# Altium PCB MTB.TEMPLATE.PcbDoc (part 1 of 3)
Units mm, origin at the board's own origin, x right, y up, seen from the top; angles counter-clockwise.
Board outline 100 x 100 mm, 2 copper layers (Top Layer, Bottom Layer), stack 1.576 mm thick; 279 components, 187 nets, 803 pads, 2 vias.
Unrouted connection lines stored in the file: 418.
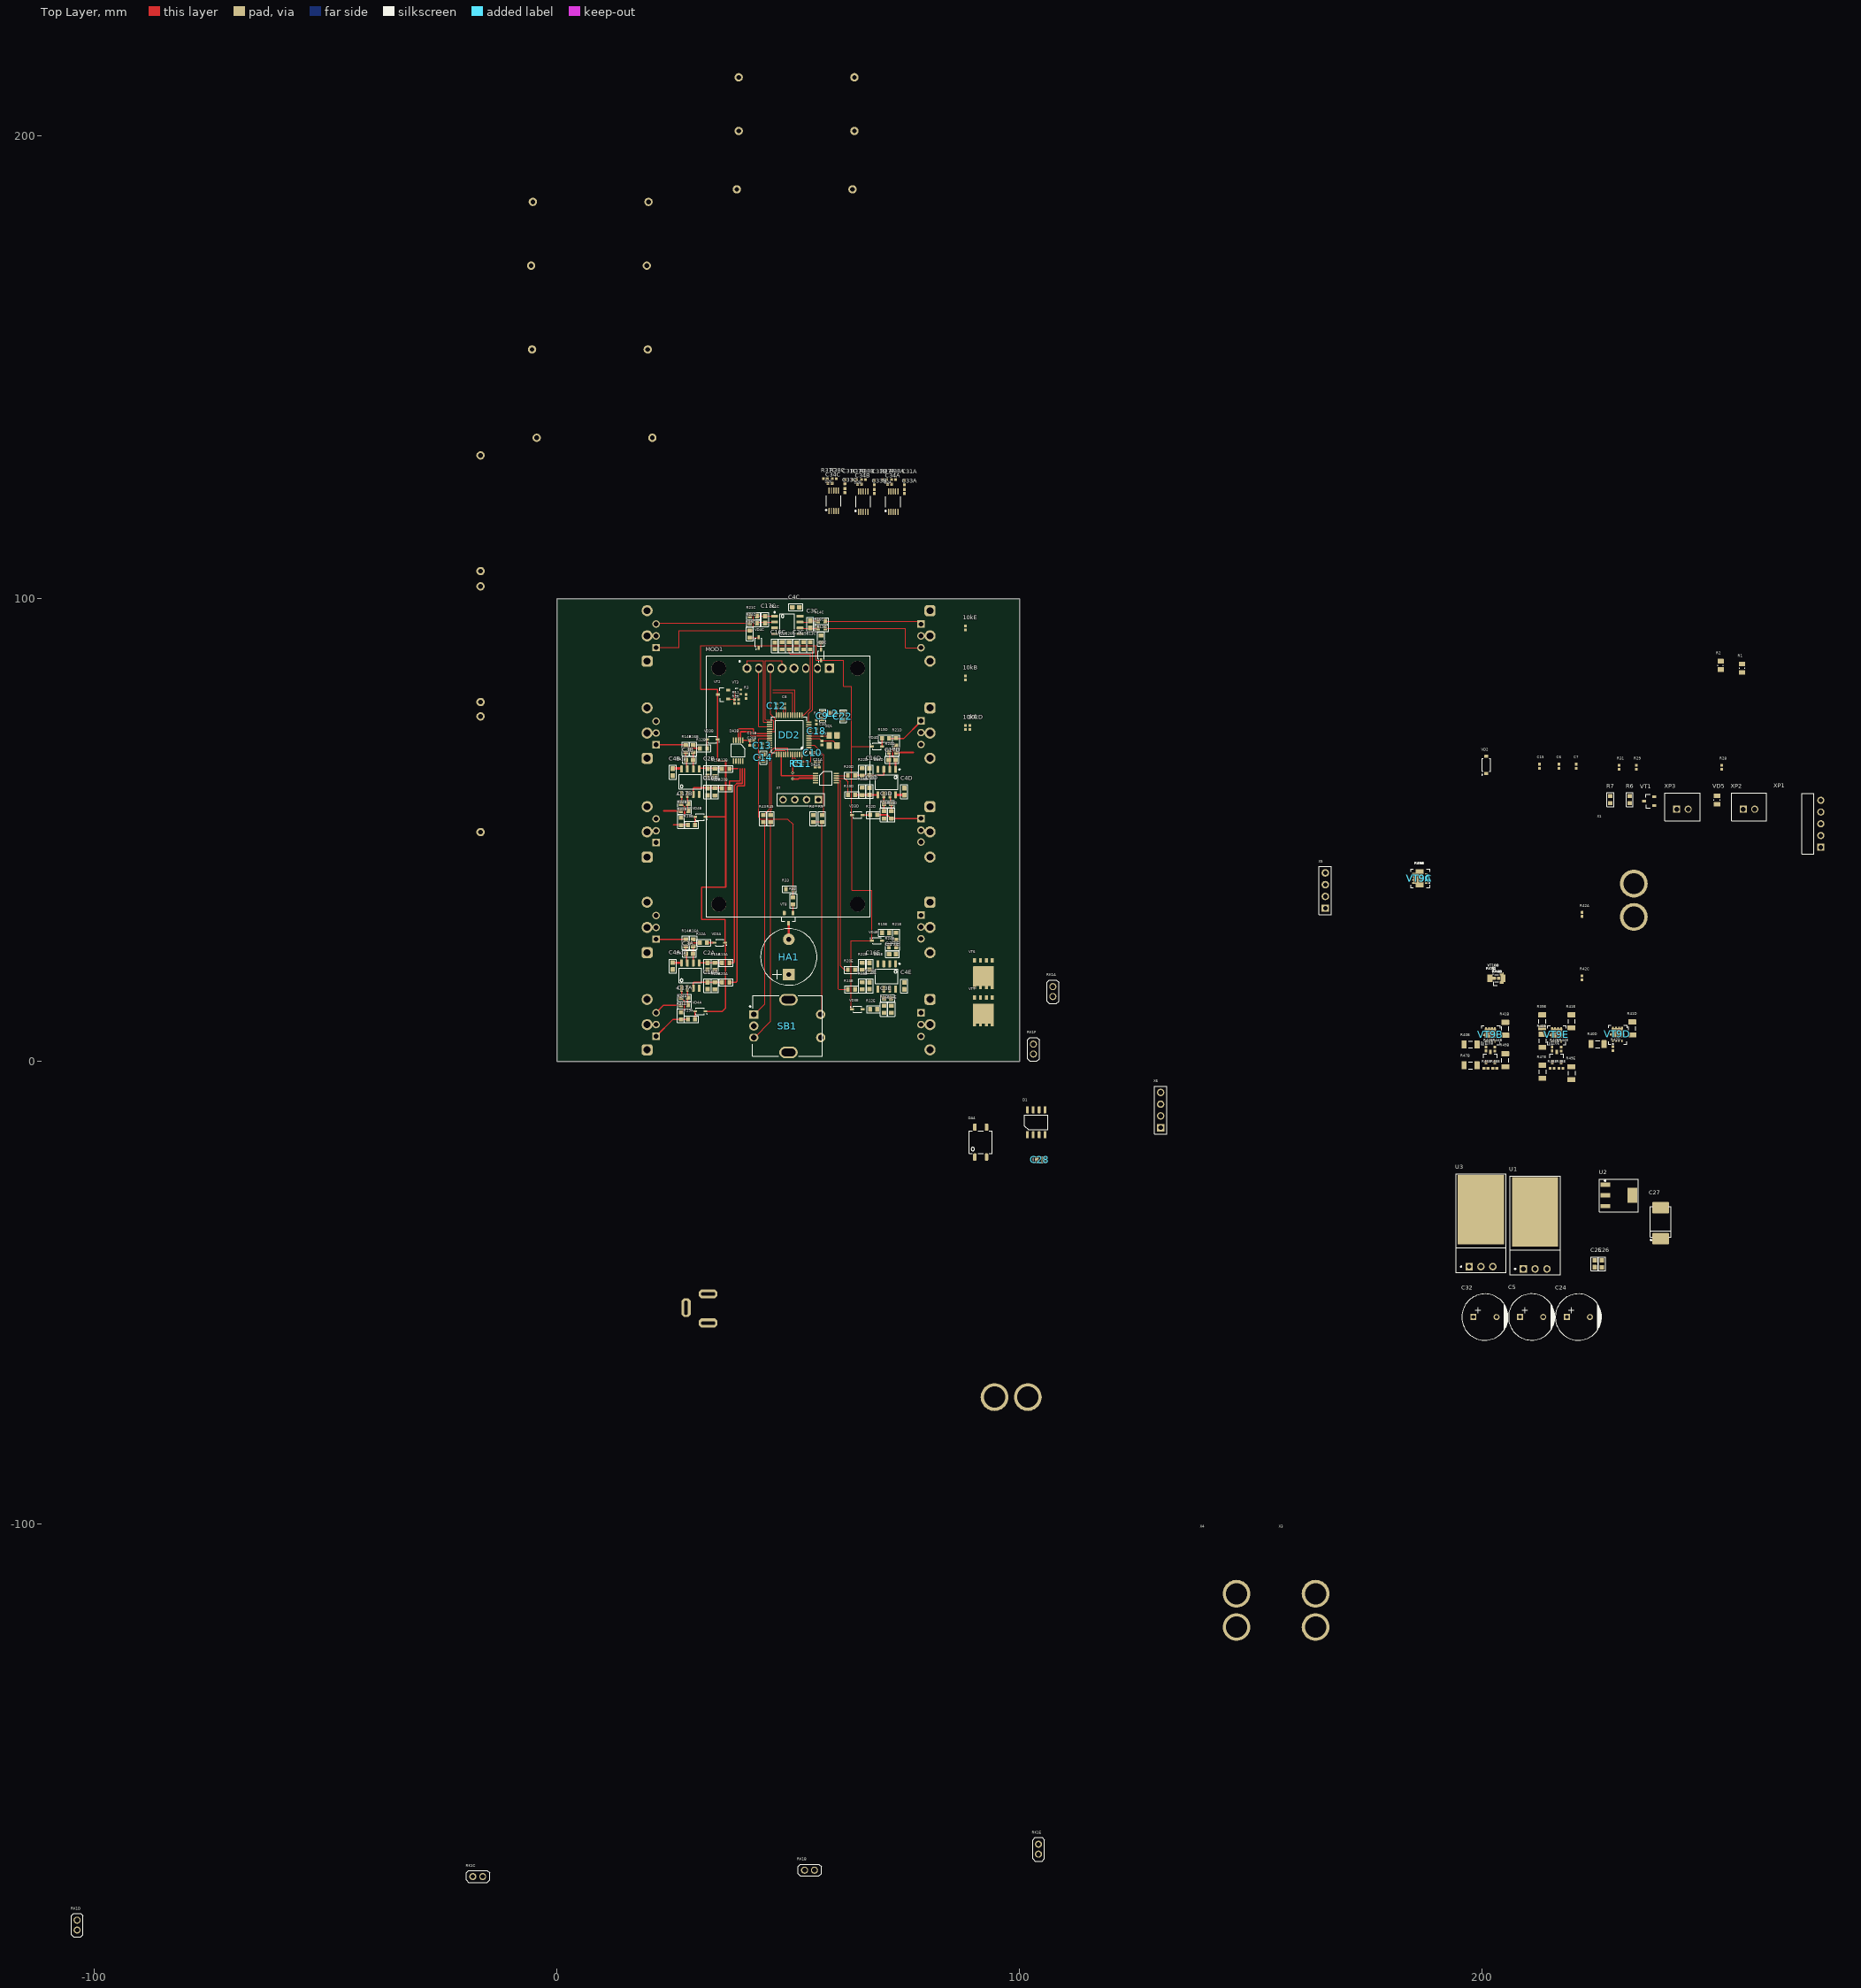
[diagram p0: Top Layer view]
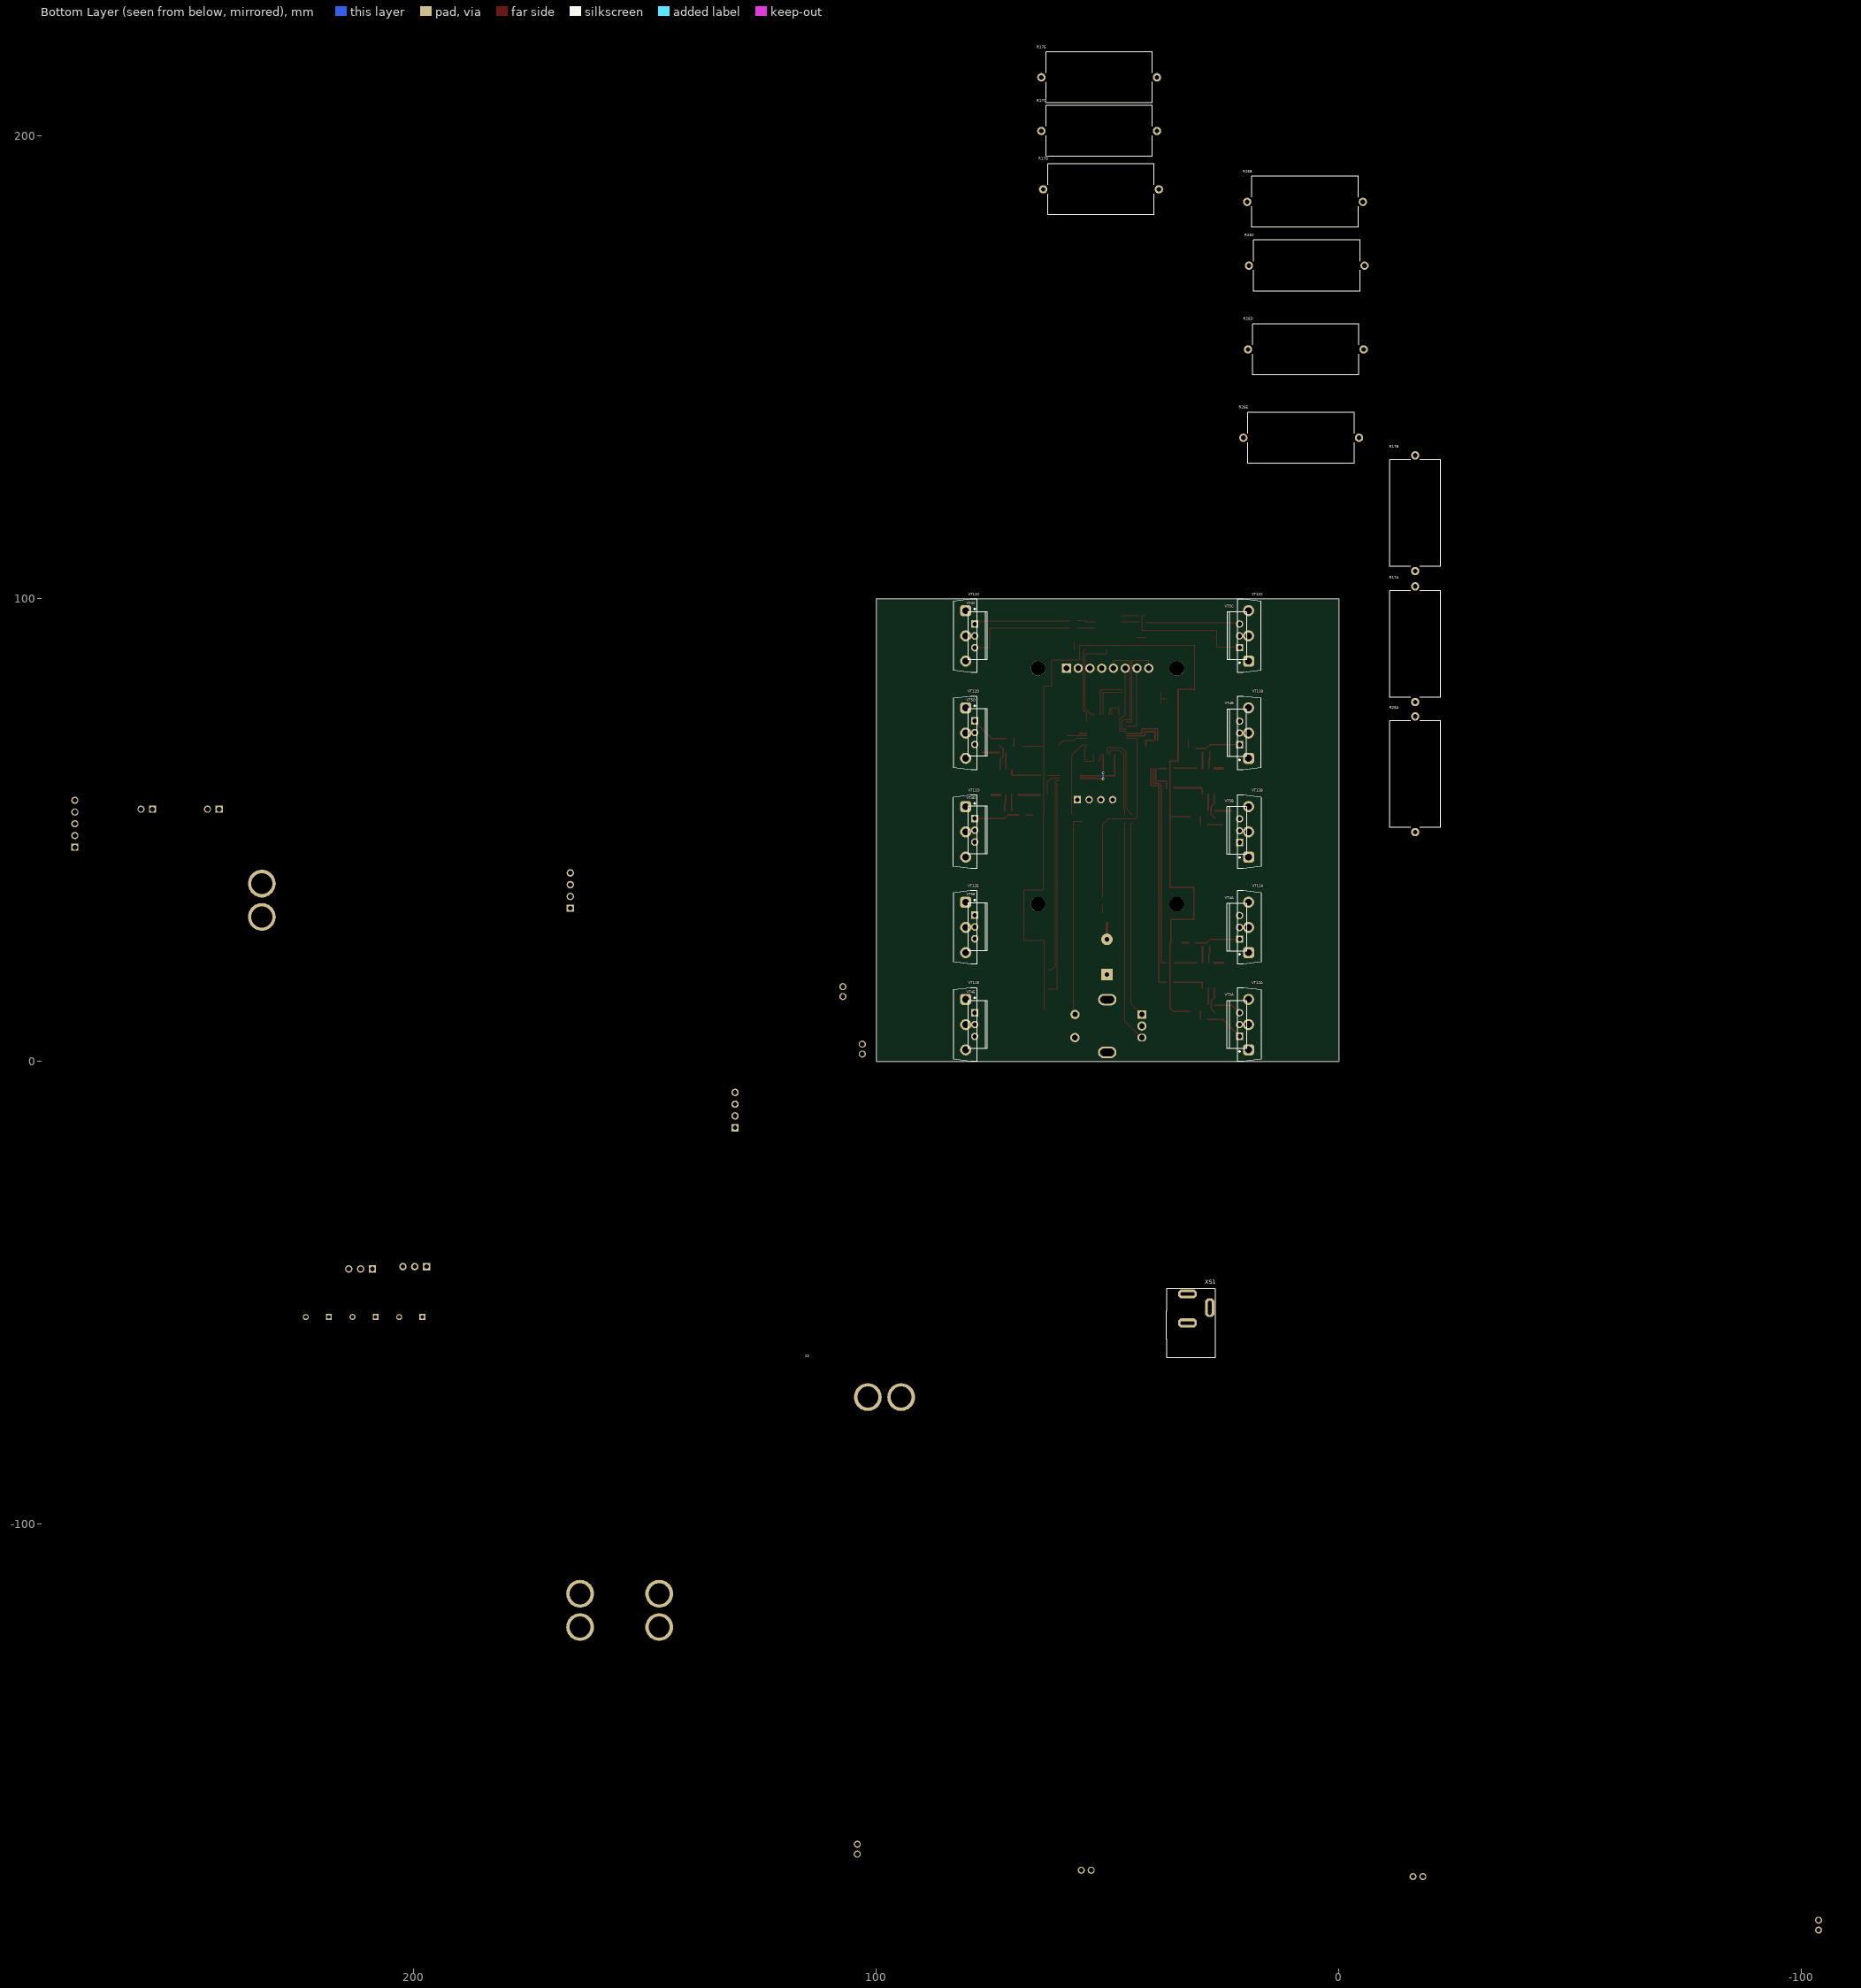
[diagram p1: Bottom Layer view, seen from below]

## Layer stack, top to bottom
Top Solder: solder mask 0.012, Solder Resist, Dk 3.5
Top Layer: signal copper 0.038
Dielectric 1: dielectric 1.5, FR-4, Dk 4.8
Bottom Layer: signal copper 0.038
Bottom Solder: solder mask 0.012, Solder Resist, Dk 3.5

## Board outline
0,0 100,0 100,100 0,100

## Design rules (kind name [scope] priority, off if disabled: settings)
BoardOutlineClearance PCIE_CONN_Clearence [InNet('RS485B(M)','24V0','RS485B(R)_OUT','RS485B(R)_IN','RS485A(FB)')] p1: gap=0.25 ignorepadtopadclearanceinfootprint=FALSE
BoardOutlineClearance [All xor InComponent('A1')] p2: gap=0.5 ignorepadtopadclearanceinfootprint=FALSE
Clearance MiddleVoltage [InNetClass('MiddleVoltage')] p1: gap=0.5 ignorepadtopadclearanceinfootprint=FALSE except(0: Arc-Hole Track-Hole SMDPad-Hole THPad-Hole Via-Hole Fill-Hole Poly-Hole Region-Hole Text-Hole; 0.2: Arc-Text Track-Text SMDPad-Text THPad-Text Via-Text Fill-Text Poly-Text Region-Text Text-Text)
Clearance HighVoltage [InNetClass('HighVoltage')] p2: gap=1 ignorepadtopadclearanceinfootprint=FALSE except(0: Arc-Hole Track-Hole SMDPad-Hole THPad-Hole Via-Hole Fill-Hole Poly-Hole Region-Hole Text-Hole; 0.2: Arc-Text Track-Text SMDPad-Text THPad-Text Via-Text Fill-Text Poly-Text Region-Text Text-Text)
Clearance Standart [All] p3: gap=0.2 ignorepadtopadclearanceinfootprint=FALSE except(0: Arc-Hole Track-Hole SMDPad-Hole THPad-Hole Via-Hole Fill-Hole Poly-Hole Region-Hole Text-Hole)
ComponentClearance [All] p1: gap=0.1 collisioncheckmode=3 verticalgap=0.1 showdistances=TRUE
DiffPairsRouting ETH_100_OHM [InDifferentialPairClass('ETH')] p1: maxlimit=0.2 minlimit=0.2 mostfreqgap=0.2 toplayer_minwidth=0.2 toplayer_maxwidth=0.3 toplayer_prefwidth=0.3 bottomlayer_minwidth=0.2 bottomlayer_maxwidth=0.3 bottomlayer_prefwidth=0.3 maxuncoupledlength=12.7
DiffPairsRouting USB_90_OHM [InDifferentialPairClass('USB')] p2: maxlimit=0.2 minlimit=0.2 mostfreqgap=0.2 toplayer_minwidth=0.2 toplayer_maxwidth=0.45 toplayer_prefwidth=0.45 bottomlayer_minwidth=0.2 bottomlayer_maxwidth=0.45 bottomlayer_prefwidth=0.45 maxuncoupledlength=12.7
DiffPairsRouting [All] p3: maxlimit=0.2 minlimit=0.2 mostfreqgap=0.2 toplayer_minwidth=0.2 toplayer_maxwidth=0.5 toplayer_prefwidth=0.3 bottomlayer_minwidth=0.2 bottomlayer_maxwidth=0.5 bottomlayer_prefwidth=0.3 maxuncoupledlength=12.7
Height [All] p1: minheight=0 maxheight=40 prefheight=12.7
HoleSize [All] p1: absolutevalues=TRUE maxlimit=12 minlimit=0.3 maxpercent=80.000 minpercent=20.000
HoleToHoleClearance [All] p1: gap=0.3 allowstackedmicrovias=TRUE
MinimumSolderMaskSliver [All] p1: minsoldermaskwidth=0.1
NetAntennae [All] p1: netantennaetolerance=2
PlaneClearance [All] p1: clearance=0.3
PlaneConnect PlaneConnectMiddleCurrent [InNetClass('MiddleCurrent')] p1: planeconnectstyle=Relief reliefexpansion=0.508 reliefentries=4 reliefconductorwidth=0.5 reliefairgap=0.3
PlaneConnect PlaneHighCurrent [InNetClass('HighCurrent')] p2: planeconnectstyle=Relief reliefexpansion=0.508 reliefentries=4 reliefconductorwidth=0.5 reliefairgap=0.35
PlaneConnect [All] p3: planeconnectstyle=Relief reliefexpansion=0.508 reliefentries=4 reliefconductorwidth=0.3 reliefairgap=0.3
PolygonConnect PolygonConnect_TPPTH [All vs HasFootprint('TP_PTH_1mm')] p1: connectstyle=Direct reliefconductorwidth=0.3 reliefentries=4 polygonreliefangle="90 Angle" airgapwidth=0.25
PolygonConnect PolygonConnect_TPSMD2mm [All vs HasFootprint('TP_SMD_2mm')] p2: connectstyle=Direct reliefconductorwidth=0.3 reliefentries=4 polygonreliefangle="90 Angle" airgapwidth=0.25
PolygonConnect PolygonConnect_Via [IsVia] p3: connectstyle=Direct reliefconductorwidth=0.254 reliefentries=4 polygonreliefangle="90 Angle" airgapwidth=0.254
PolygonConnect PolygonConnectMiddleCurrent [All vs InNetClass('MiddleCurrent')] p4: connectstyle=Relief reliefconductorwidth=0.4 reliefentries=4 polygonreliefangle="90 Angle" airgapwidth=0.3
PolygonConnect PolygonHighCurrent [InNetClass('HighCurrent')] p5: connectstyle=Relief reliefconductorwidth=0.5 reliefentries=4 polygonreliefangle="90 Angle" airgapwidth=0.3
PolygonConnect PolygonConnect_Keepout [(ObjectKind = 'Track') And (Layer = 'KeepOutLayer')] p6: connectstyle=Direct reliefconductorwidth=0.254 reliefentries=4 polygonreliefangle="90 Angle" airgapwidth=0.254
PolygonConnect [All] p7: thpad.connectstyle=Relief thpad.reliefconductorwidth=0.3 thpad.reliefentries=4 thpad.polygonreliefangle="90 Angle" thpad.airgapwidth=0.25 smdpad.connectstyle=Relief smdpad.reliefconductorwidth=0.3 smdpad.reliefentries=4 smdpad.polygonreliefangle="90 Angle" smdpad.airgapwidth=0.25 via.connectstyle=Direct via.reliefconductorwidth=0.3 via.reliefentries=4 via.polygonreliefangle="90 Angle" via.airgapwidth=0.3
RoomDefinition U_DACB [InComponentClass('U_DACB')] p1: confinementstyle=ConfineIn formatcopy=TRUE lockcomponents=FALSE outline -797.7,-753.186 -746.9,-753.186 -746.9,-727.786 -797.7,-727.786
RoomDefinition U_INA228C [InComponentClass('U_INA228C')] p2: confinementstyle=ConfineIn formatcopy=TRUE lockcomponents=FALSE outline -797.7,-753.186 -746.9,-753.186 -746.9,-727.786 -797.7,-727.786
RoomDefinition U_INA228B [InComponentClass('U_INA228B')] p3: confinementstyle=ConfineIn formatcopy=TRUE lockcomponents=FALSE outline -797.7,-753.186 -746.9,-753.186 -746.9,-727.786 -797.7,-727.786
RoomDefinition U_INA228A [InComponentClass('U_INA228A')] p4: confinementstyle=ConfineIn formatcopy=TRUE lockcomponents=FALSE outline -797.7,-753.186 -746.9,-753.186 -746.9,-727.786 -797.7,-727.786
RoomDefinition U_DACA [InComponentClass('U_DACA')] p5: confinementstyle=ConfineIn formatcopy=TRUE lockcomponents=FALSE outline -797.7,-753.186 -746.9,-753.186 -746.9,-727.786 -797.7,-727.786
RoomDefinition LOADD [InComponentClass('LOADD')] p6: confinementstyle=ConfineIn formatcopy=TRUE lockcomponents=FALSE outline -797.7,-753.186 -746.9,-753.186 -746.9,-727.786 -797.7,-727.786
RoomDefinition LOADE [InComponentClass('LOADE')] p7: confinementstyle=ConfineIn formatcopy=TRUE lockcomponents=FALSE outline -797.7,-753.186 -746.9,-753.186 -746.9,-727.786 -797.7,-727.786
RoomDefinition LOADC [InComponentClass('LOADC')] p8: confinementstyle=ConfineIn formatcopy=TRUE lockcomponents=FALSE outline -797.7,-753.186 -746.9,-753.186 -746.9,-727.786 -797.7,-727.786
RoomDefinition LOADB [InComponentClass('LOADB')] p9: confinementstyle=ConfineIn formatcopy=TRUE lockcomponents=FALSE outline -797.7,-753.186 -746.9,-753.186 -746.9,-727.786 -797.7,-727.786
RoomDefinition LOADA [InComponentClass('LOADA')] p10: confinementstyle=ConfineIn formatcopy=TRUE lockcomponents=FALSE outline -797.7,-753.186 -746.9,-753.186 -746.9,-727.786 -797.7,-727.786
RoutingCorners [All] p1: cornerstyle=45-Degree minsetback=1 maxsetback=3
RoutingVias Power [InNetClass('Power')] p1: holewidth=0.8 width=1.5 viastyle="Through Hole" minholewidth=0.5 minwidth=1 maxholewidth=1.2 maxwidth=3
RoutingVias [All] p2: holewidth=0.3 width=0.6 viastyle="Through Hole" minholewidth=0.3 minwidth=0.6 maxholewidth=0.5 maxwidth=1
SilkToSilkClearance [All] p1: silktosilkclearance=0.15
SilkToSolderMaskClearance [IsPad or IsRegion] p1: minsilkscreentomaskgap=0.15 clearancetoexposedcopper=FALSE
SolderMaskExpansion SolderMaskExpansion_VIA [IsVia] p1: expansion=-3 istentingtop=TRUE useseparateexpansions=TRUE expansionbottom=-3 istentingbottom=TRUE
SolderMaskExpansion [All] p2: expansion=0.05 istentingtop=FALSE
SupplyNets "Schematic Supply Nets_8" [InNet('VBUS')] p1: voltage=0.000
SupplyNets "Schematic Supply Nets_7" [InNet('V_MCU')] p2: voltage=0.000
SupplyNets "Schematic Supply Nets_6" [InNet('5V0')] p3: voltage=0.000
SupplyNets "Schematic Supply Nets_5" [InNet('EXTI')] p4: voltage=0.000
SupplyNets "Schematic Supply Nets_4" [InNet('POWER')] p5: voltage=0.000
SupplyNets "Schematic Supply Nets_2" [InNet('12V0')] p6: voltage=0.000
SupplyNets "Schematic Supply Nets_1" [InNet('3V3')] p7: voltage=0.000
SupplyNets "Schematic Supply Nets" [InNet('GND')] p8: voltage=0.000
Width Width_50_OHM [InNetClass('Anthenna')] p1: maxlimit=0.88 minlimit=0.2 preferedwidth=0.88
Width WidthMiddleCurrent [InNetClass('MiddleCurrent')] p2: maxlimit=2 minlimit=0.35 preferedwidth=0.5
Width WidthHighCurrent [InNetClass('HighCurrent')] p3: maxlimit=5 minlimit=0.5 preferedwidth=1
Width [All] p4: maxlimit=1 minlimit=0.2 preferedwidth=0.3
18 further rules are at their usual default settings.

## Classes and differential pairs
component class THERMO_SENSORF: 10kF RK1F
component class THERMO_SENSORE: 10kE RK1E
channel class DAC: U_DACA U_DACB
component class U_DACA: C20A C21A DA3A
component class U_BIPOLAR: DA4 R28 R29 VT6 VT7
channel class INA228: U_INA228A U_INA228B U_INA228C
component class U_INA228A: C31A C33A C34A D2A R37A R38A
component class U_INA228B: C31B C33B C34B D2B R37B R38B
component class U_INA228C: C31C C33C C34C D2C R37C R38C
component class ELOAD: C1 C5 C22 C24 C25 C26 C27 C28 C32 D1 HA1 MOD1 R1 R2 R3 R4 R6 R7 R9 R10 R11 R32 R33 R43 R45 SB1 U1 U2 U3 VD2 VD5 VT1 VT2 VT3 VT8 X1 X2 X3 X4 X5 X6 XP2 XP3 XS1
component class U_DACB: C20B C21B DA3B
channel class THERMO_SENSOR: THERMO_SENSORA THERMO_SENSORB THERMO_SENSORC THERMO_SENSORD THERMO_SENSORE THERMO_SENSORF
channel class LOAD: LOADA LOADB LOADC LOADD LOADE
component class THERMO_SENSORD: 10kD RK1D
component class THERMO_SENSORC: 10kC RK1C
component class THERMO_SENSORB: 10kB RK1B
component class THERMO_SENSORA: RK1A
component class LOADE: C2E C3E C4E C16E C17E DA1E R12E R13E R14E R15E R16E R17E R19E R20E R21E R22E R24E R26E R39E R40E R41E R42E R44E R46E R47E R48E R49E VD3E VD4E VT4E VT5E VT9E VT10E VT11E VT12E
component class LOADD: C2D C3D C4D C16D C17D DA1D R12D R13D R14D R15D R16D R17D R19D R20D R21D R22D R24D R26D R39D R40D R41D R42D R44D R46D R47D R48D R49D VD3D VD4D VT4D VT5D VT9D VT10D VT11D VT12D
component class LOADC: C2C C3C C4C C16C C17C DA1C R12C R13C R14C R15C R16C R17C R19C R20C R21C R22C R24C R26C R39C R40C R41C R42C R44C R46C R47C R48C R49C VD3C VD4C VT4C VT5C VT9C VT10C VT11C VT12C
component class LOADB: C2B C3B C4B C16B C17B DA1B R12B R13B R14B R15B R16B R17B R19B R20B R21B R22B R24B R26B R39B R40B R41B R42B R44B R46B R47B R48B R49B VD3B VD4B VT4B VT5B VT9B VT10B VT11B VT12B
component class LOADA: C2A C3A C4A C16A C17A DA1A R12A R13A R14A R15A R16A R17A R19A R20A R21A R22A R24A R26A R39A R40A R41A R42A R44A R46A R47A R48A R49A VD3A VD4A VT4A VT5A VT9A VT10A VT11A VT12A
component class U_MTB.ESP32-S3: C6 C7 C8 C9 C10 C11 C12 C13 C14 C15 C18 C29 C30 DD2 L2 R5 R30 R31 X7 XP1 ZQ1

## Components (designator, comment, footprint, x,y, rotation, side; value= is the part's Value field where it differs from the comment)
10kB "10 k" R0402 88.298,82.913 r90 top (schematic designator 10k)
10kC "10 k" R0402 88.298,72.213 r90 top (schematic designator 10k)
10kD "10 k" R0402 89.3,72.225 r90 top (schematic designator 10k)
10kE "10 k" R0402 88.298,93.713 r90 top (schematic designator 10k)
C1 "0.1µF" C_CERAMIC_0402_MED 203.098,18.013 r0 top
C2A "0.1uF" C0603(1608)#1 32.552,20.604 r270 top (schematic designator C2)
C2B "0.1uF" C0603(1608)#1 32.552,62.504 r270 top (schematic designator C2)
C2C "0.1uF" C0603(1608)#2 51.8,89.85 r270 top (schematic designator C2)
C2D "0.1uF" C0603(1608)#1 67.598,58.396 r90 top (schematic designator C2)
C2E "0.1uF" C0603(1608)#1 67.598,16.396 r90 top (schematic designator C2)
C3A "0.1uF" C0603(1608)#1 28.658,23.301 r0 top (schematic designator C3)
C3B "0.1uF" C0603(1608)#1 28.658,65.201 r0 top (schematic designator C3)
C3C "0.1uF" C0603(1608)#1 54.754,94.483 r270 top (schematic designator C3)
C3D "0.1uF" C0603(1608)#1 71.492,55.699 r180 top (schematic designator C3)
C3E "0.1uF" C0603(1608)#1 71.492,13.699 r180 top (schematic designator C3)
C4A "0.1uF" C0603(1608)#1 25.05,20.65 r270 top (schematic designator C4)
C4B "0.1uF" C0603(1608)#1 25.05,62.55 r270 top (schematic designator C4)
C4C "0.1uF" C0603(1608)#1 51.65,98.2 r180 top (schematic designator C4)
C4D "0.1uF" C0603(1608)#1 75.1,58.35 r90 top (schematic designator C4)
C4E "0.1uF" C0603(1608)#1 75.1,16.35 r90 top (schematic designator C4)
C5 "1000uF" "CAP 10x16" 210.698,-55.187 r0 top
C6 "10µF" C_CERAMIC_0402_MED 216.598,63.813 r90 top
C7 "0.1uF" C_CERAMIC_0402_MED 220.298,63.813 r90 top
C8 "0.1uF" C_CERAMIC_0402_MED 49.2,76.87 r270 top
C9 "10µF" C0603(1608)#3 57.4,74.725 r270 top
C10 "0.1uF" C_CERAMIC_0402_MED 55.3,66.8 r180 top
C11 "0.1uF" C_CERAMIC_0402_MED 53,64.36 r90 top
C12 "0.1uF" C_CERAMIC_0402_MED 47.457,76.87 r270 top
C13 "0.1uF" C_CERAMIC_0402_MED 44.385,68.29 r270 top
C14 "1µF" C0603(1608)#3 44.6,65.7 r270 top
C15 "0.1uF" C_CERAMIC_0402_MED 212.398,63.813 r90 top
C16A "0.1uF" C0603(1608)#1 32.55,16.4 r270 top (schematic designator C16)
C16B "0.1uF" C0603(1608)#1 32.55,58.3 r270 top (schematic designator C16)
C16C "0.1uF" C0603(1608)#2 47.1,89.85 r270 top (schematic designator C16)
C16D "0.1uF" C0603(1608)#1 67.6,62.6 r90 top (schematic designator C16)
C16E "0.1uF" C0603(1608)#1 67.6,20.6 r90 top (schematic designator C16)
C17A "0.1uF" C0603(1608)#1 27.6,13.799 r0 top (schematic designator C17)
C17B "0.1uF" C0603(1608)#1 27.6,55.699 r0 top (schematic designator C17)
C17C "0.1uF" C0603(1608)#1 44.982,95.521 r270 top (schematic designator C17)
C17D "0.1uF" C0603(1608)#1 72.455,65.201 r180 top (schematic designator C17)
C17E "0.1uF" C0603(1608)#1 72.55,23.201 r180 top (schematic designator C17)
C18 "0.1uF" C_CERAMIC_0402_MED 56.095,71.439 r270 top
C20A "1uF" C_CERAMIC_0402_MED 56.296,64.81 r0 top (schematic designator C20)
C20B "1uF" C_CERAMIC_0402_MED 42.131,68.339 r0 top (schematic designator C20)
C21A "0.1uF" C_CERAMIC_0402_MED 56.296,63.71 r0 top (schematic designator C21)
C21B "0.1uF" C_CERAMIC_0402_MED 42.139,69.425 r0 top (schematic designator C21)
C22 "100nF 50V" C0603(1608)#3 61.8,74.625 r90 top
C24 "1000uF" "CAP 10x16" 220.8,-55.2 r0 top
C25 "0.1uF" C0603(1608)#1 224.298,-43.687 r90 top
C26 "0.1uF" C0603(1608)#1 225.9,-43.7 r90 top
C27 "220uF" CASE_D(7343) 238.6,-34.9 r90 top
C28 "100nF 50V" C0603(1608)#3 104.4,-21.2 r180 top
C29 "12pF" C_CERAMIC_0402_MED 57.273,68.865 r270 top
C30 "12pF" C_CERAMIC_0402_MED 57.273,70.865 r90 top
C31A "10uF" C0402(1005) 75.1,125.14 r270 top (schematic designator C31)
C31B "10uF" C0402(1005) 68.603,125.143 r270 top (schematic designator C31)
C31C "10uF" C0402(1005) 62.242,125.325 r270 top (schematic designator C31)
C32 "1000uF" "CAP 10x16" 200.6,-55.2 r0 top
C33A "0.1uF" C0402(1005) 75.1,123.2 r90 top (schematic designator C33)
C33B "0.1uF" C0402(1005) 68.603,123.203 r90 top (schematic designator C33)
C33C "0.1uF" C0402(1005) 62.242,123.385 r90 top (schematic designator C33)
C34A "10nF" C0402(1005) 71.9,124.8 r180 top (schematic designator C34)
C34B "10nF" C0402(1005) 65.403,124.803 r180 top (schematic designator C34)
C34C "10nF" C0402(1005) 59.042,124.985 r180 top (schematic designator C34)
D1 "TCAN332GD" SOIC-8_W3.9MM 103.6,-13.1 r0 top
D2A "INA228AIDGSR" TI-VSSOP-10-50P490X110 72.7,121 r90 top (schematic designator D2)
D2B "INA228AIDGSR" TI-VSSOP-10-50P490X110 66.203,121.003 r90 top (schematic designator D2)
D2C "INA228AIDGSR" TI-VSSOP-10-50P490X110 59.842,121.185 r90 top (schematic designator D2)
DA1A "LM358ADT" SOIC8 28.85,18.6 r90 top (schematic designator DA1)
DA1B "LM358ADT" SOIC8 28.85,60.5 r90 top (schematic designator DA1)
DA1C "LM358ADT" SOIC8 49.8,94.35 r0 top (schematic designator DA1)
DA1D "LM358ADT" SOIC8 71.3,60.4 r270 top (schematic designator DA1)
DA1E "LM358ADT" SOIC8 71.3,18.4 r270 top (schematic designator DA1)
DA3A "MCP4728A0T-E/UN" MSOP-10 58.138,61.26 r270 top (schematic designator DA3)
DA3B "MCP4728A0T-E/UN" MSOP-10 39.2,67.2 r180 top (schematic designator DA3)
DA4 "VOM1271T" SOP-4P254_492X720X222L65X51N 91.6,-17.4 r90 top
DD2 "STM32G431CBT6" LQFP48 50.217,70.61 r180 top
HA1 "TMB12A01" KPX-1205A 50.125,18.825 r90 top
L2 "BLM18AG102" BLM18(0603) 59.6,75.3 r180 top
MOD1 "TFT 1.8\" SPI Board" 1.8_TFT_BOARD 67.5,87.5 r180 top locked
R1 "30k" R_ANY_CHIP_0805_MED 256.2,85 r90 top
R2 "100k" R_ANY_CHIP_0805_MED 251.575,85.626 r90 top
R3 "10k" R_ANY_CHIP_0402_MED 40.911,78.918 r90 top
R4 "10 k" R0603 55.417,52.5 r90 top
R5 "1k" R_ANY_CHIP_0402_MED 51.7,64.36 r270 top
R6 "100" R0603 231.898,56.613 r90 top
R7 "100 k" R0603 227.698,56.613 r90 top
R9 "100" R0603 57.317,52.5 r90 top
R10 "220" R_ANY_CHIP_0402_MED 38.825,77.4 r180 top
R11 "220" R_ANY_CHIP_0402_MED 38.825,78.3 r180 top
R12A "1 k" R0603 31.7,25.7 r180 top (schematic designator R12)
R12B "1 k" R0603 31.71,67.69 r180 top (schematic designator R12)
R12C "1 k" R0603 57.1,91.325 r90 top (schematic designator R12)
R12D "1 k" R0603 68.45,53.3 r0 top (schematic designator R12)
R12E "1 k" R0603 68.45,11.3 r0 top (schematic designator R12)
R13A "1 k" R0603 36.499,21.371 r180 top (schematic designator R13)
R13B "1 k" R0603 36.499,63.271 r180 top (schematic designator R13)
R13C "1 k" R0603 54.777,89.85 r90 top (schematic designator R13)
R13D "1 k" R0603 63.72,57.629 r0 top (schematic designator R13)
R13E "1 k" R0603 63.651,15.629 r0 top (schematic designator R13)
R14A "1 k" R0603 27.85,25.675 r90 top (schematic designator R14)
R14B "1 k" R0603 27.85,67.575 r90 top (schematic designator R14)
R14C "1 k" R0603 57.228,95.195 r0 top (schematic designator R14)
R14D "1 k" R0603 72.3,53.325 r270 top (schematic designator R14)
R14E "1 k" R0603 72.3,11.325 r270 top (schematic designator R14)
R15A "1 k" R0603 34.152,20.604 r90 top (schematic designator R15)
R15B "1 k" R0603 34.152,62.504 r90 top (schematic designator R15)
R15C "1 k" R0603 53.3,89.85 r90 top (schematic designator R15)
R15D "1 k" R0603 65.998,58.396 r270 top (schematic designator R15)
R15E "1 k" R0603 65.998,16.396 r270 top (schematic designator R15)
R16A "1 k" R0603 29.45,25.675 r90 top (schematic designator R16)
R16B "1 k" R0603 29.45,67.575 r90 top (schematic designator R16)
R16C "1 k" R0603 57.228,93.66 r0 top (schematic designator R16)
R16D "1 k" R0603 70.7,53.325 r270 top (schematic designator R16)
R16E "1 k" R0603 70.7,11.325 r270 top (schematic designator R16)
R17A "0.22" R5W -16.5,90.2 r270 bottom (schematic designator R17)
R17B "0.22" R5W -16.5,118.5 r270 bottom (schematic designator R17)
R17C "0.22" R5W 51.8,201.1 r180 bottom (schematic designator R17)
R17D "0.22" R5W 51.4,188.5 r180 bottom (schematic designator R17)
R17E "0.22" R5W 51.8,212.7 r180 bottom (schematic designator R17)
R19A "1 k" R0603 29.096,9.153 r180 top (schematic designator R19)
R19B "1 k" R0603 29.106,51.143 r180 top (schematic designator R19)
R19C "1 k" R0603 41.7,92.4 r90 top (schematic designator R19)
R19D "1 k" R0603 71.054,69.847 r0 top (schematic designator R19)
R19E "1 k" R0603 71.054,27.847 r0 top (schematic designator R19)
R20A "1 k" R0603 36.499,17.153 r180 top (schematic designator R20)
R20B "1 k" R0603 36.499,59.053 r180 top (schematic designator R20)
R20C "1 k" R0603 50.2,89.85 r90 top (schematic designator R20)
R20D "1 k" R0603 63.651,61.847 r0 top (schematic designator R20)
R20E "1 k" R0603 63.651,19.847 r0 top (schematic designator R20)
R21A "1 k" R0603 26.825,9.9 r270 top (schematic designator R21)
R21B "1 k" R0603 26.835,51.89 r270 top (schematic designator R21)
R21C "1 k" R0603 42.5,96.3 r180 top (schematic designator R21)
R21D "1 k" R0603 73.325,69.1 r90 top (schematic designator R21)
R21E "1 k" R0603 73.325,27.1 r90 top (schematic designator R21)
R22A "1 k" R0603 34.15,16.4 r90 top (schematic designator R22)
R22B "1 k" R0603 34.15,58.3 r90 top (schematic designator R22)
R22C "1 k" R0603 48.7,89.85 r90 top (schematic designator R22)
R22D "1 k" R0603 66,62.6 r270 top (schematic designator R22)
R22E "1 k" R0603 66,20.6 r270 top (schematic designator R22)
R24A "1 k" R0603 27.6,12.2 r180 top (schematic designator R24)
R24B "1 k" R0603 27.61,54.19 r180 top (schematic designator R24)
R24C "1 k" R0603 42.494,94.718 r180 top (schematic designator R24)
R24D "1 k" R0603 72.55,66.8 r0 top (schematic designator R24)
R24E "1 k" R0603 72.55,24.8 r0 top (schematic designator R24)
R26A "0.22" R5W -16.5,62.1 r270 bottom (schematic designator R26)
R26B "0.22" R5W 7.301,185.782 r0 bottom (schematic designator R26)
R26C "0.22" R5W 6.936,172.001 r0 bottom (schematic designator R26)
R26D "0.22" R5W 7.136,153.901 r0 bottom (schematic designator R26)
R26E "0.22" R5W 8.136,134.801 r0 bottom (schematic designator R26)
R28 "220" R_ANY_CHIP_0402_MED 251.798,63.613 r90 top
R29 "1k" R_ANY_CHIP_0402_MED 233.298,63.613 r90 top
R30 "10k" R_ANY_CHIP_0402_MED 56.1,73.375 r270 top
R31 "22" R_ANY_CHIP_0402_MED 229.598,63.613 r90 top
R32 "100" R0603 51.046,34.742 r270 top
R33 "100 k" R0603 50.271,37.267 r0 top
R37A "10" R0402 70.875,125.8 r180 top (schematic designator R37)
R37B "10" R0402 64.378,125.803 r180 top (schematic designator R37)
R37C "10" R0402 58.017,125.985 r180 top (schematic designator R37)
R38A "10" R0402 72.8,125.8 r0 top (schematic designator R38)
R38B "10" R0402 66.303,125.803 r0 top (schematic designator R38)
R38C "10" R0402 59.942,125.985 r0 top (schematic designator R38)
R39A "0" R_ANY_CHIP_1206_MED 186.498,39.613 r90 top (schematic designator R39)
R39B "0" R_ANY_CHIP_1206_MED 186.498,39.613 r90 top (schematic designator R39)
R39C "0" R_ANY_CHIP_1206_MED 186.498,39.613 r90 top (schematic designator R39)
R39D "0" R_ANY_CHIP_1206_MED 186.498,39.613 r90 top (schematic designator R39)
R39E "0" R_ANY_CHIP_1206_MED 212.978,8.7 r270 top (schematic designator R39)
R40A "0" R_ANY_CHIP_1206_MED 186.498,39.613 r90 top (schematic designator R40)
R40B "0" R_ANY_CHIP_1206_MED 197.502,3.699 r0 top (schematic designator R40)
R40C "0" R_ANY_CHIP_1206_MED 186.498,39.613 r90 top (schematic designator R40)
R40D "0" R_ANY_CHIP_1206_MED 224.945,3.781 r0 top (schematic designator R40)
R40E "0" R_ANY_CHIP_1206_MED 213,4.5 r270 top (schematic designator R40)
R41A "0" R_ANY_CHIP_1206_MED 186.498,39.613 r90 top (schematic designator R41)
R41B "0" R_ANY_CHIP_1206_MED 205.002,7.099 r270 top (schematic designator R41)
R41C "0" R_ANY_CHIP_1206_MED 186.498,39.613 r90 top (schematic designator R41)
R41D "0" R_ANY_CHIP_1206_MED 232.445,7.181 r270 top (schematic designator R41)
R41E "0" R_ANY_CHIP_1206_MED 219.3,8.7 r270 top (schematic designator R41)
R42A "100k" R_ANY_CHIP_0402_MED 221.598,31.813 r90 top (schematic designator R42)
R42B "100k" R_ANY_CHIP_0402_MED 200.821,2.741 r270 top (schematic designator R42)
R42C "100k" R_ANY_CHIP_0402_MED 221.598,18.113 r90 top (schematic designator R42)
R42D "100k" R_ANY_CHIP_0402_MED 228.264,2.822 r270 top (schematic designator R42)
R42E "100k" R_ANY_CHIP_0402_MED 215.119,2.742 r270 top (schematic designator R42)
R43 "100" R0603 44.6,52.5 r90 top
R44A "100" R_ANY_CHIP_0402_MED 203.098,18.013 r0 top (schematic designator R44)
R44B "100" R_ANY_CHIP_0402_MED 202.766,2.712 r270 top (schematic designator R44)
R44C "100" R_ANY_CHIP_0402_MED 203.098,18.013 r0 top (schematic designator R44)
R44D "100" R_ANY_CHIP_0402_MED 203.098,18.013 r0 top (schematic designator R44)
R44E "100" R_ANY_CHIP_0402_MED 217.064,2.713 r270 top (schematic designator R44)
R45 "100" R0603 46.2,52.5 r90 top
R46A "1k" R_ANY_CHIP_0402_MED 203.098,18.013 r0 top (schematic designator R46)
R46B "1k" R_ANY_CHIP_0402_MED 200.814,-1.441 r0 top (schematic designator R46)
R46C "1k" R_ANY_CHIP_0402_MED 203.098,18.013 r0 top (schematic designator R46)
R46D "1k" R_ANY_CHIP_0402_MED 203.098,18.013 r0 top (schematic designator R46)
R46E "1k" R_ANY_CHIP_0402_MED 215.112,-1.44 r0 top (schematic designator R46)
R47A "0" R_ANY_CHIP_1206_MED 203.098,18.013 r0 top (schematic designator R47)
R47B "0" R_ANY_CHIP_1206_MED 197.502,-0.801 r180 top (schematic designator R47)
R47C "0" R_ANY_CHIP_1206_MED 203.098,18.013 r0 top (schematic designator R47)
R47D "0" R_ANY_CHIP_1206_MED 203.098,18.013 r0 top (schematic designator R47)
R47E "0" R_ANY_CHIP_1206_MED 213,-2.2 r270 top (schematic designator R47)
R48A "100k" R_ANY_CHIP_0402_MED 203.098,18.013 r0 top (schematic designator R48)
R48B "100k" R_ANY_CHIP_0402_MED 202.735,-1.434 r0 top (schematic designator R48)
R48C "100k" R_ANY_CHIP_0402_MED 203.098,18.013 r0 top (schematic designator R48)
R48D "100k" R_ANY_CHIP_0402_MED 203.098,18.013 r0 top (schematic designator R48)
R48E "100k" R_ANY_CHIP_0402_MED 217.033,-1.433 r0 top (schematic designator R48)
R49A "0" R_ANY_CHIP_1206_MED 203.098,18.013 r0 top (schematic designator R49)
R49B "0" R_ANY_CHIP_1206_MED 205.002,0.299 r90 top (schematic designator R49)
R49C "0" R_ANY_CHIP_1206_MED 203.098,18.013 r0 top (schematic designator R49)
R49D "0" R_ANY_CHIP_1206_MED 203.098,18.013 r0 top (schematic designator R49)
R49E "0" R_ANY_CHIP_1206_MED 219.3,-2.5 r270 top (schematic designator R49)
RK1A "MF55-103F-3435" MF55-103F-3435 107.2,15.133 r0 top (schematic designator RK1)
RK1B "MF55-103F-3435" MF55-103F-3435 54.6,-174.735 r90 top (schematic designator RK1)
RK1C "MF55-103F-3435" MF55-103F-3435 -17.1,-176.105 r90 top (schematic designator RK1)
RK1D "MF55-103F-3435" MF55-103F-3435 -103.7,-186.6 r0 top (schematic designator RK1)
RK1E "MF55-103F-3435" MF55-103F-3435 104.098,-170.187 r0 top (schematic designator RK1)
RK1F "MF55-103F-3435" MF55-103F-3435 102.998,2.713 r0 top (schematic designator RK1)
SB1 "EC11-PH-15" EC11-PH-15 49.8,7.7 r270 top
U1 "L7812CV" TO220-AB-H 208.9,-44.8 r0 top
U2 "LD1117STR" SOT223 229.8,-28.9 r0 top value=LD1117S33CTR
U3 "L7805CV" TO220-AB-H 197.2,-44.3 r0 top
VD2 "MMSZ4713T1G" SOD-123_MED 200.898,64.113 r90 top
VD3A "BAT54WS" SOD-323_MED 35.2,25.7 r180 top (schematic designator VD3)
VD3B "BAT54WS" SOD-323_MED 33.6,69.6 r180 top (schematic designator VD3)
VD3C "BAT54WS" SOD-323_MED 57.1,87.875 r90 top (schematic designator VD3)
VD3D "BAT54WS" SOD-323_MED 64.95,53.3 r0 top (schematic designator VD3)
VD3E "BAT54WS" SOD-323_MED 64.95,11.3 r0 top (schematic designator VD3)
VD4A "BAT54WS" SOD-323_MED 30.971,10.872 r180 top (schematic designator VD4)
VD4B "BAT54WS" SOD-323_MED 30.981,52.862 r180 top (schematic designator VD4)
VD4C "BAT54WS" SOD-323_MED 43.6,90.575 r90 top (schematic designator VD4)
VD4D "BAT54WS" SOD-323_MED 69.179,68.128 r0 top (schematic designator VD4)
VD4E "BAT54WS" SOD-323_MED 69.179,26.128 r0 top (schematic designator VD4)
VD5 "1N4148" D0805 250.798,56.513 r90 top
VT1 "IRLML6244" SOT-23 236.098,56.313 r0 top
VT2 "IRLML6344" SOT-23_MED 35.9,79.3 r0 top
VT3 "DTC143ZET1G" SOT-416 39.1,79.9 r90 top
VT4A "IRFZ44NPBF" TO-220 21.45,26.46 r90 bottom (schematic designator VT4)
VT4B "IRFZ44NPBF" TO-220 21.45,68.46 r90 bottom (schematic designator VT4)
VT4C "IRFZ44NPBF" TO-220 78.7,94.54 r270 bottom (schematic designator VT4)
VT4D "IRFZ44NPBF" TO-220 78.7,52.54 r270 bottom (schematic designator VT4)
VT4E "IRFZ44NPBF" TO-220 78.7,10.54 r270 bottom (schematic designator VT4)
VT5A "IRFZ44NPBF" TO-220 21.45,5.46 r90 bottom (schematic designator VT5)
VT5B "IRFZ44NPBF" TO-220 21.45,47.36 r90 bottom (schematic designator VT5)
VT5C "IRFZ44NPBF" TO-220 21.45,89.46 r90 bottom (schematic designator VT5)
VT5D "IRFZ44NPBF" TO-220 78.7,73.64 r270 bottom (schematic designator VT5)
VT5E "IRFZ44NPBF" TO-220 78.7,31.64 r270 bottom (schematic designator VT5)
VT6 "STL220N6F7" VSONP-CLIP-8_5.0x6.00mm 92.195,19 r180 top
VT7 "STL220N6F7" VSONP-CLIP-8_5.0x6.00mm 92.2,10.95 r180 top
VT8 "IRLML6244" SOT-23_MED 50.1,31 r90 top
VT9A "AON7403" DFN3X3 186.498,39.613 r90 top (schematic designator VT9)
VT9B "AON7403" DFN3X3 201.802,5.799 r0 top (schematic designator VT9)
VT9C "AON7403" DFN3X3 186.498,39.613 r90 top (schematic designator VT9)
VT9D "AON7403" DFN3X3 229.245,5.881 r0 top (schematic designator VT9)
VT9E "AON7403" DFN3X3 216.1,5.8 r0 top (schematic designator VT9)
VT10A "IRLML6244" SOT-23_MED 203.098,18.013 r0 top (schematic designator VT10)
VT10B "IRLML6244" SOT-23_MED 201.802,0.999 r270 top (schematic designator VT10)
VT10C "IRLML6244" SOT-23_MED 203.098,18.013 r0 top (schematic designator VT10)
VT10D "IRLML6244" SOT-23_MED 203.098,18.013 r0 top (schematic designator VT10)
VT10E "IRLML6244" SOT-23_MED 216.1,1 r270 top (schematic designator VT10)
VT11A "IRFP3710PBF" TO-247-3 19.5,29 r90 bottom (schematic designator VT11)
VT11B "IRFP3710PBF" TO-247-3 19.5,71 r90 bottom (schematic designator VT11)
VT11C "IRFP3710PBF" TO-247-3 80.65,92 r270 bottom (schematic designator VT11)
VT11D "IRFP3710PBF" TO-247-3 80.65,49.65 r270 bottom (schematic designator VT11)
VT11E "IRFP3710PBF" TO-247-3 80.65,8 r270 bottom (schematic designator VT11)
VT12A "IRFP3710PBF" TO-247-3 19.5,8 r90 bottom (schematic designator VT12)
VT12B "IRFP3710PBF" TO-247-3 19.5,49.65 r90 bottom (schematic designator VT12)
VT12C "IRFP3710PBF" TO-247-3 19.5,92 r90 bottom (schematic designator VT12)
VT12D "IRFP3710PBF" TO-247-3 80.65,71 r270 bottom (schematic designator VT12)
VT12E "IRFP3710PBF" TO-247-3 80.65,29 r270 bottom (schematic designator VT12)
X1 "XT60E-F" XT60E-F 232.781,38.472 r0 top
X2 "XT60E-F" XT60E-F 101.8,-72.5 r90 bottom
X3 "XT60E-F" XT60E-F 163.998,-114.987 r0 top
X4 "XT60E-F" XT60E-F 146.898,-114.987 r0 top
X5 "PLS-4 (Part of PLS-40)" DS1021-04S 166.1,36.97 r90 top
X6 "PLS-4 (Part of PLS-40)" DS1021-04S 130.5,-10.47 r90 top
X7 "PLS-4 (Part of PLS-40)" DS1021-04S 52.7,56.6 r180 top
XP1 "USB-Type-C-B-229" CON_5R_Pitch_2.54mm_1_Rows 273.197,46.313 r90 top
XP2 "B2B-XH-2" B2B-XH-2 257.698,54.513 r0 top
XP3 "B2B-XH-2" B2B-XH-2 243.298,54.513 r0 top
XS1 "DJK-02A" DC-140-003 37.2,-58.6 r180 bottom
ZQ1 "C3E-24.000-18-1010-R" CXA-321_REC 59.7,69.4 r270 top

## Footprints (in the part's own frame and the unit in brackets; to place one, negate y for a bottom-side part, rotate by r counter-clockwise, add the part's x,y. Pads: shape width x height; smd on the part's side, far side on the other; paste and mask are expansions set on the pad)
1.8_TFT_BOARD [mm]
  rect 2x2 hole 1.2: 1(8.63,2.5)
  oval 1.5x2 / inner round 2 / far side round 2 hole 1.2: 2(11.17,2.5) 3(13.71,2.5) 6(21.33,2.5) 7(23.87,2.5)
  round 2 hole 1.2: 4(16.25,2.5) 5(18.79,2.5) 8(26.41,2.5)
  round 3.2 hole 3.2: MH(2.5,2.5) MH(2.5,53.5) MH(32.5,2.5) MH(32.5,53.5)
  silkscreen extent -0.18,-0.16 35.29,56.2, body extent 0,0 35,56, height 6.6
B2B-XH-2 [mm]
  rect 1.55x1.55 hole 1.05: 1(-1.275,0.05)
  round 1.55 hole 1.05: 2(1.225,0.05)
  silkscreen extent -3.78,-2.45 3.8,3.5, body extent -3.7,-2.35 3.7,3.4, height 7
BLM18(0603) [mm] "Ferrite  Chips series blm18 Case 0603 (1.60mm x 0.80mm)"
  rect 0.75x0.9 smd: 1(-0.725,0) 2(0.725,0)
  silkscreen extent -0.15,-0.5 0.15,0.5, body extent -0.8,-0.4 0.8,0.4, height 0.8
C0402(1005) [mm]
  rrect15% 0.62x0.62 smd mask+0.05: 1(-0.44,0) 2(0.44,0)
  body extent -0.52,-0.27 0.53,0.28, height 0.55
C0603(1608)#1 [mm]
  rrect15% 1x0.95 smd mask+0.05: 1(-0.75,0) 2(0.75,0)
  Top Layer pour cut-out: -0.05,0.45 0.05,0.45 0.05,-0.45 -0.05,-0.45
  silkscreen extent -1.5,-0.75 1.5,0.75, body extent -0.9,-0.5 0.9,0.5, height 0.9
C0603(1608)#2 [mm]
  rrect15% 0.85x1 smd mask+0.05: 1(-0.75,0) 2(0.75,0)
  Top Layer pour cut-out: -0.05,0.45 0.05,0.45 0.05,-0.45 -0.05,-0.45
  silkscreen extent -1.5,-0.75 1.5,0.75, body extent -0.9,-0.5 0.9,0.5, height 0.9
C0603(1608)#3 [mm] "Chip Capacitor, 2-Leads, Body 1.60x0.80mm, IPC Medium Density"
  rect 0.9x1 smd: 1(-0.675,0) 2(0.675,0)
  silkscreen extent -1.4,-0.7 1.4,0.7, body extent -0.8,-0.41 0.8,0.41, height 0.82
C_CERAMIC_0402_MED [mm] "Chip Capacitor, 2-Leads, Body 1,00x0,50mm, IPC Medium Density"
  rrect15% 0.62x0.62 smd mask+0.05: 1(-0.44,0) 2(0.44,0)
  body extent -0.52,-0.27 0.53,0.28, height 0.55
"CAP 10x16" [mm]
  rect 1.3x1.3 hole 0.8: 1(-2.5,0)
  round 1.3 hole 0.8: 2(2.5,0)
  silkscreen extent -5,-5 5,5, body extent -5,-5 5,5, height 16
CASE_D(7343) [mm]
  rrect15% 2.5x3.6 smd mask+0.05: 1(-3.35,0) 2(3.35,0)
  silkscreen extent -3.77,-2.25 3.6,2.25, body extent -3.65,-2.15 3.65,2.15, height 2.8
CON_5R_Pitch_2.54mm_1_Rows [mm]
  rect 1.55x1.55 hole 1: 1(0,0)
  round 1.55 hole 1: 2(2.54,0) 3(5.08,0) 4(7.62,0) 5(10.16,0)
  silkscreen extent -1.46,1.52 11.62,4.06, body extent -1.28,-0.33 11.42,9.9, height 3.07
CXA-321_REC [mm] "SMD 3.2x2.5mm Crystal SMD-4"
  rrect15% 1.4x1.2 smd mask+0.05: 1(-1.1,-0.85) 2(1.1,-0.85) 3(1.1,0.85) 4(-1.1,0.85)
  body extent -1.68,-1.33 1.68,1.33, height 0.74
D0805 [mm]
  rrect15% 1x1.45 smd mask+0.05: 1(-0.9,0) 2(0.9,0)
  silkscreen extent -0.1,-0.67 0.1,0.67, body extent -1.1,-0.72 1.1,0.73, height 0.95
DC-140-003 [mm]
  oct 4x2 hole 0.7 slot 3 at 0 deg unplated: 1(4.5,8.4) 2(4.5,2.1)
  oct 2x4 hole 0.7 slot 3 at 90 deg unplated: 3(9.3,5.4)
  silkscreen extent -0.1,-5.4 10.5,9.5, body extent 0,-5.35 9.45,9.15, height 11
DFN3X3 [mm]
  rect 0.35x0.5 smd: 1(-0.983,-1.408) 2(-0.333,-1.408) 3(0.317,-1.408) 4(0.967,-1.408)
  rect 0.4x0.35 smd: 5(0.967,1.492) 6(0.317,1.492) 7(-0.333,1.492) 8(-0.983,1.492)
  rect 0.4x0.45 smd: 8(-1.423,-0.008) 8(1.407,-0.008)
  rect 2.45x1.98 smd: 8(-0.008,0.352)
  silkscreen extent -2,-2.11 2,2, body extent -1.6,-1.6 1.6,1.6, height 0.56
DS1021-04S [mm] "2.54mm 4-pin connector"
  rect 1.6x1.6 hole 1: 1(-3.81,0)
  round 1.6 hole 1: 2(-1.27,0) 3(1.27,0) 4(3.81,0)
  silkscreen extent -5.18,-1.33 5.18,1.33, body extent -5.08,-1.24 5.08,1.25, height 8.54
EC11-PH-15 [mm]
  rect 1.8x2 hole 1.2 paste-2539.97: 1(-2.5,-7.238)
  round 2 hole 1.2 paste-2539.97: 2(0,-7.237) 4(2.5,7.238) 5(-2.5,7.212)
  oval 1.7x2 hole 1.2 paste-2539.97: 3(2.5,-7.238)
  oval 2.5x4 hole 1.6 slot 3 at 90 deg: MH(-5.7,0.263) MH(5.7,0.263)
  silkscreen extent -6.58,-8.16 6.53,7.59, body extent -6.55,-7.49 6.55,7.46, height 24.6
KPX-1205A [mm]
  rect 2.5x2.5 hole 1: 1(0,0)
  round 2.5 hole 1: 2(7.6,0)
  silkscreen extent -2.3,-6.1 9.9,6.1, body extent -2.22,-6 9.78,6, height 9.5
LQFP48 [mm] "LQFP, 48-Leads, Body 7.00x7.00mm, Pitch 0.50mm, IPC Medium Density"
  oval 1.2x0.3 smd: 1(-4.25,2.75) 2(-4.25,2.25) 3(-4.25,1.75) 4(-4.25,1.25) 5(-4.25,0.75) 6(-4.25,0.25) 7(-4.25,-0.25) 8(-4.25,-0.75) 9(-4.25,-1.25) 10(-4.25,-1.75) 11(-4.25,-2.25) 12(-4.25,-2.75) 25(4.25,-2.75) 26(4.25,-2.25) 27(4.25,-1.75) 28(4.25,-1.25) 29(4.25,-0.75) 30(4.25,-0.25) 31(4.25,0.25) 32(4.25,0.75) 33(4.25,1.25) 34(4.25,1.75) 35(4.25,2.25) 36(4.25,2.75)
  oval 0.3x1.2 smd: 13(-2.75,-4.25) 14(-2.25,-4.25) 15(-1.75,-4.25) 16(-1.25,-4.25) 17(-0.75,-4.25) 18(-0.25,-4.25) 19(0.25,-4.25) 20(0.75,-4.25) 21(1.25,-4.25) 22(1.75,-4.25) 23(2.25,-4.25) 24(2.75,-4.25) 37(2.75,4.25) 38(2.25,4.25) 39(1.75,4.25) 40(1.25,4.25) 41(0.75,4.25) 42(0.25,4.25) 43(-0.25,4.25) 44(-0.75,4.25) 45(-1.25,4.25) 46(-1.75,4.25) 47(-2.25,4.25) 48(-2.75,4.25)
  silkscreen extent -4.75,-3.85 3.85,4.2, body extent -4.51,-4.51 4.51,4.51, height 1.55
MF55-103F-3435 [mil]
  round 60 hole 40: 1(0,-42) 2(0,42)
  silkscreen extent -49,-101 51,99, body extent -10,-71 10,71, height 1122
MSOP-10 [mm]
  rrect50% 0.3x1.2 smd mask+0.05: 1(-1,-2.25) 2(-0.5,-2.25) 3(0,-2.25) 4(0.5,-2.25) 5(1,-2.25) 6(1,2.25) 7(0.5,2.25) 8(0,2.25) 9(-0.5,2.25) 10(-1,2.25)
  silkscreen extent -1.5,-1.45 1.5,1.35, body extent -1.55,-2.45 1.55,2.45, height 1.1
R5W [mm]
  round 1.8 hole 1: 1(-12.5,0) 2(12.5,0)
  silkscreen extent -11.5,-5.5 11.5,5.5, body extent -12.9,-5.5 12.91,5.5, height 10.01
R0402 [mm]
  rrect15% 0.6x0.55 smd mask+0.05: 1(-0.425,0) 2(0.425,0)
  body extent -0.5,-0.25 0.5,0.25, height 0.35
R0603 [mm]
  rrect15% 0.85x1 smd mask+0.05: 1(-0.775,0) 2(0.775,0)
  silkscreen extent -1.5,-0.75 1.5,0.75, body extent -0.85,-0.42 0.85,0.38, height 0.56
R_ANY_CHIP_0402_MED [mm] "Chip Resistor, 2-Leads, Body 1,00x0,50mm, IPC Medium Density"
  rrect15% 0.6x0.55 smd mask+0.05: 1(-0.425,0) 2(0.425,0)
  body extent -0.52,-0.27 0.53,0.28, height 0.4
R_ANY_CHIP_0805_MED [mm] "Chip Resistor, 2-Leads, Body 2,00x1,25mm, IPC Medium Density"
  rrect15% 1x1.35 smd: 1(-0.9,0) 2(0.9,0)
  silkscreen extent -0.1,-0.58 0.1,0.58, body extent -1,-0.67 1,0.68, height 0.6
R_ANY_CHIP_1206_MED [mm] "Chip Resistor, 2-Leads, Body 3,10x1,60mm, IPC Medium Density"
  rrect15% 1.1x1.7 smd: 1(-1.4,0) 2(1.4,0)
  silkscreen extent -0.45,-0.75 0.45,0.75, body extent -1.6,-0.85 1.6,0.85, height 0.65
SOD-123_MED [mm] "SOD-123, 2-Leads, Body 1,60x3,71mm, IPC Medium Density"
  rrect15% 0.65x0.85 smd mask+0.05: AN(1.85,0) CA(-1.85,0)
  silkscreen extent -2.2,-0.9 1.4,0.97, body extent -1.95,-0.9 1.95,0.9, height 1.18
SOD-323_MED [mm] "SOD-323, 2-Leads, Body 1,25x2,50mm, IPC Medium Density"
  rrect15% 0.85x0.45 smd paste+0 mask+0.05: AN(1.125,0) CA(-1.125,0)
  silkscreen extent -1.5,-0.7 0.9,0.7, body extent -1.3,-0.67 1.3,0.68, height 1.1
SOIC8 [mm]
  rrect50% 1.52x0.6 smd: 1(-2.74,1.905) 2(-2.74,0.635) 3(-2.74,-0.635) 4(-2.74,-1.905) 5(2.74,-1.905) 6(2.74,-0.635) 7(2.74,0.635) 8(2.74,1.905)
  silkscreen extent -2.86,-2.45 1.58,2.87, body extent -3,-2.45 3,2.45, height 1.75
SOIC-8_W3.9MM [mm]
  rrect50% 0.6x1.55 smd mask+0.05: 1(-1.905,-2.7) 2(-0.635,-2.7) 3(0.635,-2.7) 4(1.905,-2.7) 5(1.905,2.7) 6(0.635,2.7) 7(-0.635,2.7) 8(-1.905,2.7)
  silkscreen extent -2.5,-1.6 2.5,1.6, body extent -2.5,-3 2.5,3, height 1.75
SOP-4P254_492X720X222L65X51N [mm] "Small Outline IC (SOIC), 2.54 mm pitch; 4 pin, 4.92 mm L X 4.82 mm W X 2.22 mm H body"
  rrect51% 1.56x0.74 smd: 1(-3.225,1.27) 2(-3.225,-1.27) 3(3.225,-1.27) 4(3.225,1.27)
  silkscreen extent -2.41,-2.46 2.41,2.46, body extent -3.6,-2.46 3.6,2.46, height 2.23
SOT223 [mm]
  rect 2.1x0.9 smd: 1(-3.154,2.3) 2(-3.154,0) 3(-3.154,-2.3)
  rect 2.1x3.2 smd: 4(2.646,0)
  silkscreen extent -4.47,-3.52 3.95,3.55, body extent -3.78,-3.25 3.18,3.25, height 1.7
SOT-23 [mm]
  rrect15% 0.9x0.6 smd mask+0.05: 1(1.1,-0.95) 2(1.1,0.95) 3(-1.1,0)
  silkscreen extent -0.7,-1.5 0.2,1.5, body extent -1.27,-1.5 1.28,1.5, height 1.15
SOT-23_MED [mm] "SOT23, 3-Leads, Body 2,92x2,37mm, Pitch 0,95mm, IPC Medium Density"
  rrect15% 0.9x0.6 smd mask+0.05: 1(1.1,-0.95) 2(1.1,0.95) 3(-1.1,0)
  silkscreen extent -0.7,-1.5 0.2,1.5, body extent -1.27,-1.5 1.28,1.5, height 1.15
SOT-416 [mm]
  rrect15% 0.35x0.5 smd mask+0.05: 1(-0.5,-0.65) 2(0.5,-0.65) 3(0,0.65)
  silkscreen extent -0.85,-0.05 0.85,0.45, body extent -0.8,-0.8 0.8,0.8, height 0.78
TI-VSSOP-10-50P490X110 [mm] "TSSOP, 10-Leads, Body 3.00x3.00mm, Pitch 0.50mm, IPC Medium Density"
  oval 1.35x0.28 smd mask+0.05: 1(-2.225,1) 2(-2.225,0.5) 3(-2.225,0) 4(-2.225,-0.5) 5(-2.225,-1) 6(2.225,-1) 7(2.225,-0.5) 8(2.225,0) 9(2.225,0.5) 10(2.225,1)
  silkscreen extent -2.12,-1.6 1.15,1.77, body extent -2.45,-1.55 2.45,1.55, height 1.1
TO220-AB-H [mm]
  rect 1.6x1.6 hole 1: 1(0,0)
  round 1.6 hole 1: 2(2.54,0) 3(5.1,0)
  rect 10x15 smd mask+0.05: 2(2.54,12.319)
  silkscreen extent -2.92,-1.27 8,20.07, body extent -2.41,-0.37 7.49,19.84, height 4.55
TO-220 [mm]
  rect 1.6x1.6 hole 1: 1(0,0)
  round 1.6 hole 1: 2(2.54,0) 3(5.1,0)
  silkscreen extent -3.38,-1.5 7.69,2.72, body extent -2.54,-1.4 7.62,3.18, height 18.54
TO-247-3 [mm] "TO247, 3 Terminals, Vertical, 20,0x15,6mm Body, Pitch 5.45mm"
  rrect50% 2.4x2.4 hole 1.5 mask+0.05: 1(-5.45,0)
  round 2.4 hole 1.5 mask+0.05: 2(0,0) 3(5.45,0)
  silkscreen extent -7.93,-2.65 7.93,2.42, body extent -7.98,-2.73 7.92,2.37, height 25.45
VSONP-CLIP-8_5.0x6.00mm [mm] "SON 5x6mm Body NexFET MOSFET"
  rrect25% 0.65x0.85 smd mask+0.05: D(-1.905,2.9) D(-0.635,2.9) D(0.635,2.9) D(1.905,2.9)
  rrect5% 4.5x4.3 smd paste-2539.97 mask+0.05: D(0,0.55)
  rrect25% 0.65x1 smd mask+0.05: G(1.905,-2.895) S(-1.905,-2.895) S(-0.635,-2.895) S(0.635,-2.895)
  body extent -2.58,-3.17 2.57,3.18, height 1.1
XT60E-F [mm]
  round 6 hole 4.55: 1(0,0) 2(0,-7.2)
  body extent -7.85,-20.65 7.9,13.35, height 16